# Altium PCB temperature.PcbDoc (part 3 of 3)
Units mil, origin at the board's own origin, x right, y up, seen from the top; angles counter-clockwise.
Board outline 6000 x 4000 mil, 2 copper layers (Top Layer, Bottom Layer); 10 components, 17 nets, 62 pads, 0 vias.
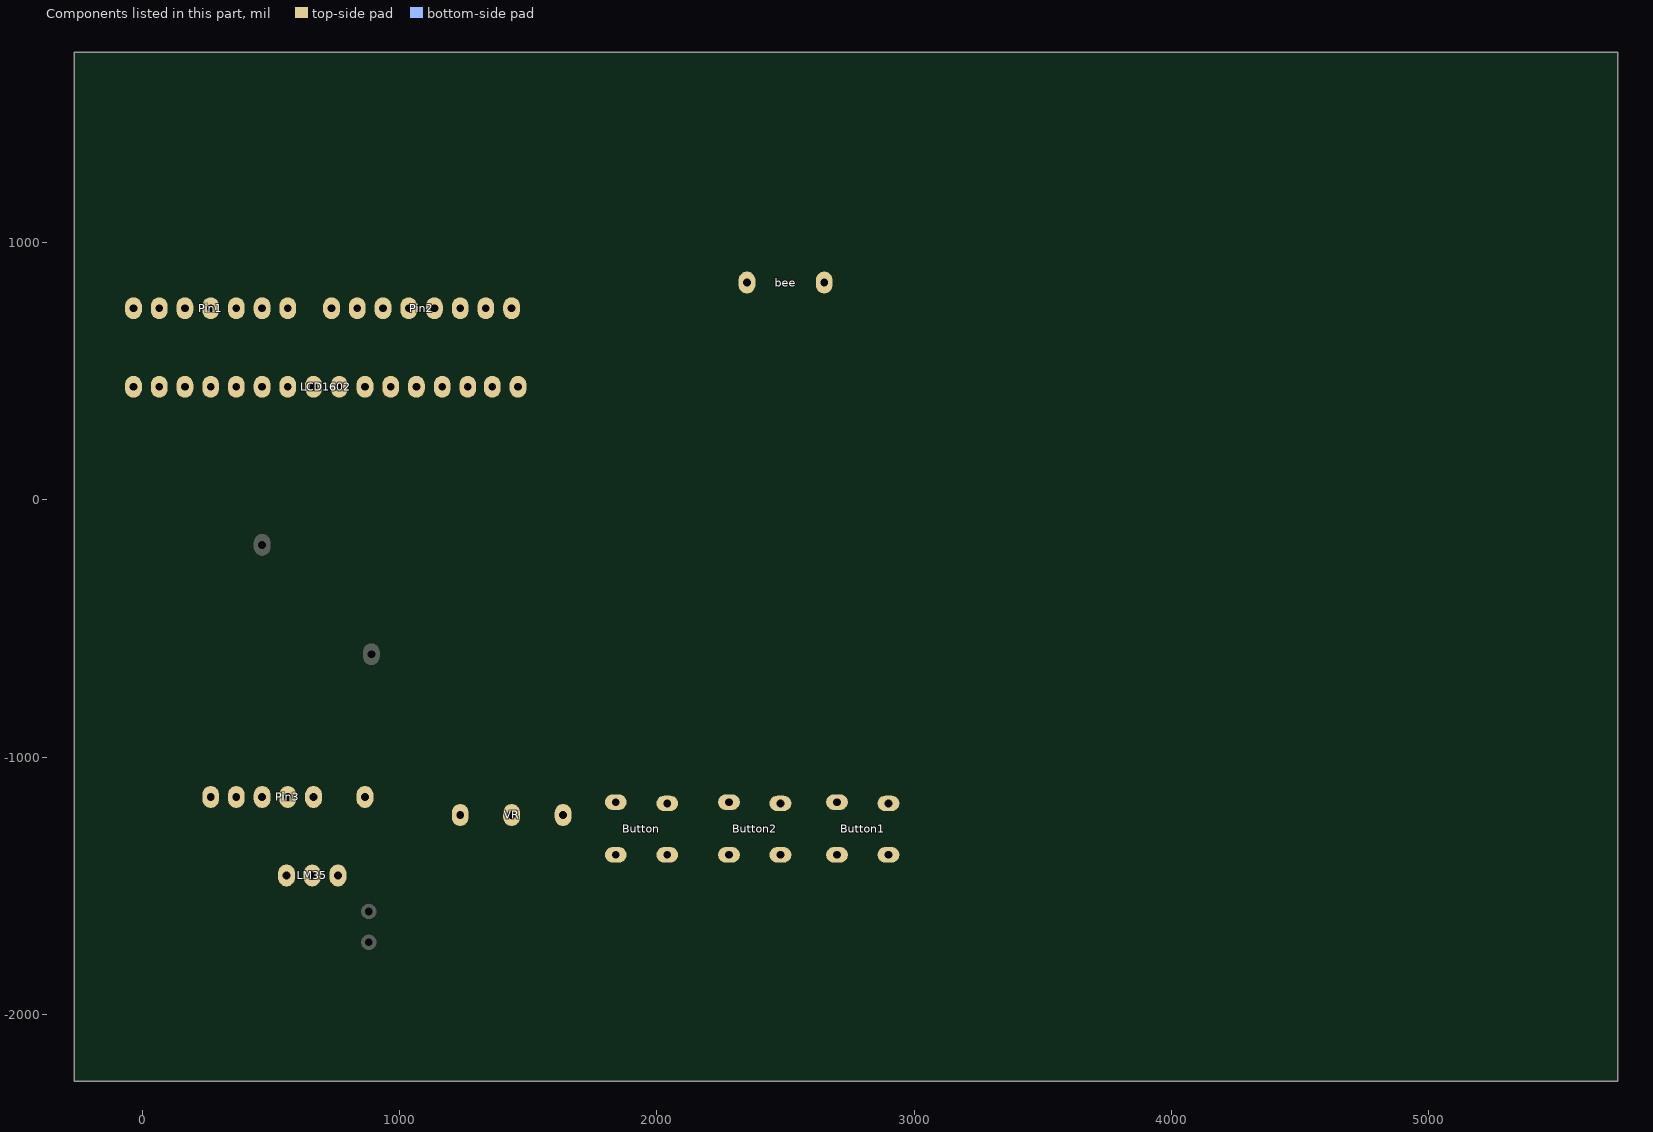
[diagram p3: the components of this part, seen from the top]

## Nets (pads, with @x,y where several pads share a name; then routed paths per layer and width w, separated by ;. In a path a pad name is that pad's centre, name@x,y a point inside that pad or via, vN(x,y) a via of type N, cw(c..) or ccw(c..) an arc to the next point about the centre after c; other vN are vias at no path point) (continued)
copper on no net: (continued)
  Bottom Layer w1: 2606,193 2607,193 ; 2606,195 2609,195 ; 2606,203 2607,203 ; 2606,205 2608,205 ; 2607,-398 2710,-398 ; 2607,-245 2626,-245 ; 2607,69 2738,69 ; 2607,189 2608,189 ; 2607,192 2611,192 ; 2608,-399 2709,-399 ; 2608,68 2738,68 ; 2608,199 2609,199 ; 2608,200 2609,200 ; 2608,202 2609,202 ; 2608,204 2611,204 ; 2609,-400 2707,-400 ; 2609,-244 2626,-244 ; 2609,67 2738,67 ; 2609,187 2653,187 ; 2609,188 2653,188 ; 2609,190 2610,190 ; 2609,194 2610,194 ; 2609,201 2610,201 ; 2609,203 2611,203 ; 2610,-401 2706,-401 ; 2610,-243 2626,-243 ; 2610,-242 2625,-242 ; 2610,-241 2626,-241 ; 2610,-240 2625,-240 ; 2610,-239 2626,-239 ; 2610,-238 2624,-238 ; 2610,-237 2625,-237 ; 2610,-236 2624,-236 ; 2610,-232 2622,-232 ; 2610,-231 2623,-231 ; 2610,-230 2622,-230 ; 2610,-166 2611,-166 ; 2610,-164 2611,-164 ; 2610,-162 2613,-162 ; 2610,66 2739,66 ; 2610,191 2651,191 ; 2610,195 2611,195 ; 2610,197 2612,197 ; 2610,198 2611,198 ; 2610,200 2611,200 ; 2610,205 2643,205 ; 2610,206 2642,206 ; 2611,-235 2625,-235 ; 2611,-234 2625,-234 ; 2611,-233 2624,-233 ; 2611,-229 2623,-229 ; 2611,-228 2623,-228 ; 2611,-227 2622,-227 ; 2611,-226 2623,-226 ; 2611,-225 2622,-225 ; 2611,-224 2620,-224 ; 2611,-223 2622,-223 ; 2611,-221 2618,-221 ; 2611,-170 2612,-170 ; 2611,-167 2613,-167 ; 2611,-165 2613,-165 ; 2611,65 2739,65 ; 2611,189 2652,189 ; 2611,190 2651,190 ; 2611,193 2649,193 ; 2611,194 2613,194 ; 2611,199 2646,199 ; 2611,201 2612,201 ; 2611,202 2612,202 ; 2612,-402 2705,-402 ; 2612,-222 2620,-222 ; 2612,-220 2620,-220 ; 2612,-219 2618,-219 ; 2612,-218 2619,-218 ; 2612,-216 2613,-216 ; 2612,-214 2613,-214 ; 2612,-209 2615,-209 ; 2612,-193 2613,-193 ; 2612,-185 2613,-185 ; 2612,-174 2613,-174 ; 2612,-172 2613,-172 ; 2612,-171 2613,-171 ; 2612,-169 2613,-169 ; 2612,-168 2613,-168 ; 2612,-164 2613,-164 ; 2612,-163 2613,-163 ; 2612,63 2740,63 ; 2612,64 2740,64 ; 2612,192 2650,192 ; 2612,195 2648,195 ; 2612,196 2613,196 ; 2612,200 2645,200 ; 2612,203 2644,203 ; 2612,204 2644,204 ; 2613,-217 2616,-217 ; 2613,-215 2614,-215 ; 2613,-212 2615,-212 ; 2613,-210 2614,-210 ; 2613,-207 2615,-207 ; 2613,-206 2614,-206 ; 2613,-205 2614,-205 ; 2613,-202 2614,-202 ; 2613,-201 2614,-201 ; 2613,-195 2614,-195 ; 2613,62 2741,62 ; 2613,197 2647,197 ; 2613,198 2646,198 ; 2613,201 2645,201 ; 2613,202 2644,202 ; 2614,-403 2703,-403 ; 2614,-216 2618,-216 ; 2614,-214 2616,-214 ; 2614,-213 2615,-213 ; 2614,-199 2615,-199 ; 2614,-197 2615,-197 ; 2614,61 2741,61 ; 2614,194 2617,194 ; 2614,196 2647,196 ; 2615,-215 2616,-215 ; 2615,-211 2616,-211 ; 2615,-210 2616,-210 ; 2615,59 2742,59 ; 2615,60 2742,60 ; 2616,-404 2702,-404 ; 2616,-213 2617,-213 ; 2616,58 2743,58 ; 2617,-405 2700,-405 ; 2617,-217 2618,-217 ; 2617,-215 2618,-215 ; 2617,-214 2618,-214 ; 2617,57 2743,57 ; 2618,-406 2698,-406 ; 2618,55 2744,55 ; 2618,56 2744,56 ; 2618,194 2649,194 ; 2619,-221 2621,-221 ; 2619,-216 2620,-216 ; 2619,54 2744,54 ; 2620,-407 2696,-407 ; 2620,53 2745,53 ; 2621,51 2746,51 ; 2621,52 2745,52 ; 2622,-408 2694,-408 ; 2622,50 2746,50 ; 2623,-232 2624,-232 ; 2623,-230 2625,-230 ; 2623,-227 2624,-227 ; 2623,48 2747,48 ; 2623,49 2747,49 ; 2624,-409 2692,-409 ; 2624,-310 2625,-310 ; 2624,-273 2625,-273 ; 2624,-267 2626,-267 ; 2624,-231 2625,-231 ; 2624,47 2747,47 ; 2625,-279 2626,-279 ; 2625,-263 2627,-263 ; 2625,-258 2627,-258 ; 2625,-238 2626,-238 ; 2625,45 2748,45 ; 2625,46 2748,46 ; 2626,-336 2628,-336 ; 2626,-268 2627,-268 ; 2626,-259 2627,-259 ; 2626,-254 2627,-254 ; 2626,-249 2627,-249 ; 2626,-248 2627,-248 ; 2626,43 2749,43 ; 2626,44 2749,44 ; 2627,-410 2689,-410 ; 2627,41 2750,41 ; 2627,42 2750,42 ; 2628,39 2751,39 ; 2628,40 2750,40 ; 2629,-342 2630,-342 ; 2629,37 2752,37 ; 2629,38 2751,38 ; 2630,-411 2687,-411 ; 2630,35 2752,35 ; 2630,36 2752,36 ; 2631,-347 2632,-347 ; 2631,34 2753,34 ; 2632,-351 2634,-351 ; 2632,-348 2633,-348 ; 2632,32 2754,32 ; 2632,33 2753,33 ; 2633,-412 2683,-412 ; 2633,29 2755,29 ; 2633,30 2754,30 ; 2633,31 2754,31 ; 2634,27 2756,27 ; 2634,28 2756,28 ; 2635,25 2756,25 ; 2635,26 2756,26 ; 2636,23 2757,23 ; 2636,24 2757,24 ; 2637,-413 2679,-413 ; 2637,-359 2640,-359 ; 2637,21 2758,21 ; 2637,22 2757,22 ; 2638,18 2759,18 ; 2638,19 2759,19 ; 2638,20 2758,20 ; 2639,15 2760,15 ; 2639,16 2760,16 ; 2639,17 2759,17 ; 2640,13 2761,13 ; 2640,14 2761,14 ; 2641,-414 2675,-414 ; 2641,10 2762,10 ; 2641,11 2762,11 ; 2641,12 2761,12 ; 2642,-362 2643,-362 ; 2642,7 2763,7 ; 2642,8 2763,8 ; 2642,9 2762,9 ; 2643,-365 2645,-365 ; 2643,3 2764,3 ; 2643,4 2764,4 ; 2643,5 2764,5 ; 2643,6 2764,6 ; 2644,-1 2766,-1 ; 2644,0 2765,0 ; 2644,1 2765,1 ; 2644,2 2764,2 ; 2645,-367 2647,-367 ; 2645,-5 2767,-5 ; 2645,-4 2767,-4 ; 2645,-3 2767,-3 ; 2645,-2 2766,-2 ; 2646,-10 2769,-10 ; 2646,-9 2769,-9 ; 2646,-8 2769,-8 ; 2646,-7 2768,-7 ; 2646,-6 2767,-6 ; 2647,-415 2668,-415 ; 2647,-205 2743,-205 ; 2647,-203 2747,-203 ; 2647,-202 2746,-202 ; 2647,-200 2746,-200 ; 2647,-198 2750,-198 ; 2647,-195 2750,-195 ; 2647,-194 2749,-194 ; 2647,-13 2770,-13 ; 2647,-12 2770,-12 ; 2647,-11 2769,-11 ; 2648,-367 2649,-367 ; 2648,-210 2649,-210 ; 2648,-208 2742,-208 ; 2648,-207 2743,-207 ; 2648,-206 2743,-206 ; 2648,-204 2744,-204 ; 2648,-201 2746,-201 ; 2648,-199 2748,-199 ; 2648,-197 2748,-197 ; 2648,-196 2751,-196 ; 2648,-193 2749,-193 ; 2648,-192 2750,-192 ; 2648,-191 2751,-191 ; 2648,-190 2751,-190 ; 2648,-188 2752,-188 ; 2648,-146 2776,-146 ; 2648,-145 2776,-145 ; 2648,-144 2776,-144 ; 2648,-143 2776,-143 ; 2648,-142 2777,-142 ; 2648,-18 2771,-18 ; 2648,-17 2771,-17 ; 2648,-16 2771,-16 ; 2648,-15 2771,-15 ; 2648,-14 2770,-14 ; 2649,-209 2650,-209 ; 2649,-189 2751,-189 ; 2649,-187 2650,-187 ; 2649,-184 2755,-184 ; 2649,-183 2756,-183 ; 2649,-182 2756,-182 ; 2649,-181 2756,-181 ; 2649,-180 2756,-180 ; 2649,-179 2757,-179 ; 2649,-178 2757,-178 ; 2649,-177 2758,-177 ; 2649,-176 2759,-176 ; 2649,-175 2760,-175 ; 2649,-147 2775,-147 ; 2649,-141 2777,-141 ; 2649,-140 2777,-140 ; 2649,-139 2777,-139 ; 2649,-138 2753,-138 ; 2649,-22 2772,-22 ; 2649,-21 2772,-21 ; 2649,-20 2772,-20 ; 2649,-19 2772,-19 ; 2650,-212 2739,-212 ; 2650,-211 2738,-211 ; 2650,-210 2739,-210 ; 2650,-174 2760,-174 ; 2650,-137 2752,-137 ; 2650,-136 2752,-136 ; 2650,-27 2774,-27 ; 2650,-26 2773,-26 ; 2650,-25 2773,-25 ; 2650,-24 2773,-24 ; 2650,-23 2773,-23 ; 2651,-370 2652,-370 ; 2651,-218 2652,-218 ; 2651,-215 2734,-215 ; 2651,-214 2736,-214 ; 2651,-213 2737,-213 ; 2651,-209 2742,-209 ; 2651,-187 2753,-187 ; 2651,-186 2753,-186 ; 2651,-185 2754,-185 ; 2651,-173 2761,-173 ; 2651,-172 2761,-172 ; 2651,-171 2762,-171 ; 2651,-170 2763,-170 ; 2651,-169 2763,-169 ; 2651,-168 2764,-168 ; 2651,-135 2750,-135 ; 2651,-134 2778,-134 ; 2651,-133 2778,-133 ; 2651,-132 2779,-132 ; 2651,-131 2779,-131 ; 2651,-35 2776,-35 ; 2651,-34 2775,-34 ; 2651,-33 2775,-33 ; 2651,-32 2775,-32 ; 2651,-31 2775,-31 ; 2651,-30 2775,-30 ; 2651,-29 2774,-29 ; 2651,-28 2774,-28 ; 2652,-221 2653,-221 ; 2652,-217 2731,-217 ; 2652,-216 2735,-216 ; 2652,-167 2765,-167 ; 2652,-166 2765,-166 ; 2652,-148 2775,-148 ; 2652,-130 2779,-130 ; 2652,-129 2779,-129 ; 2652,-128 2779,-128 ; 2652,-127 2780,-127 ; 2652,-126 2780,-126 ; 2652,-42 2777,-42 ; 2652,-41 2777,-41 ; 2652,-40 2777,-40 ; 2652,-39 2777,-39 ; 2652,-38 2777,-38 ; 2652,-37 2776,-37 ; 2652,-36 2776,-36 ; 2653,-222 2654,-222 ; 2653,-220 2728,-220 ; 2653,-219 2730,-219 ; 2653,-218 2732,-218 ; 2653,-149 2775,-149 ; 2653,-125 2780,-125 ; 2653,-124 2780,-124 ; 2653,-123 2781,-123 ; 2653,-122 2781,-122 ; 2653,-121 2781,-121 ; 2653,-120 2781,-120 ; 2653,-119 2781,-119 ; 2653,-55 2780,-55 ; 2653,-54 2780,-54 ; 2653,-53 2779,-53 ; 2653,-52 2779,-52 ; 2653,-51 2779,-51 ; 2653,-50 2779,-50 ; 2653,-49 2779,-49 ; 2653,-48 2778,-48 ; 2653,-47 2778,-47 ; 2653,-46 2778,-46 ; 2653,-45 2778,-45 ; 2653,-44 2778,-44 ; 2653,-43 2777,-43 ; 2654,-221 2728,-221 ; 2654,-118 2781,-118 ; 2654,-117 2781,-117 ; 2654,-116 2781,-116 ; 2654,-115 2781,-115 ; 2654,-114 2781,-114 ; 2654,-113 2781,-113 ; 2654,-112 2781,-112 ; 2654,-111 2781,-111 ; 2654,-110 2782,-110 ; 2654,-109 2782,-109 ; 2654,-108 2782,-108 ; 2654,-107 2782,-107 ; 2654,-106 2782,-106 ; 2654,-81 2782,-81 ; 2654,-80 2782,-80 ; 2654,-79 2782,-79 ; 2654,-78 2782,-78 ; 2654,-77 2782,-77 ; 2654,-76 2782,-76 ; 2654,-75 2782,-75 ; 2654,-74 2782,-74 ; 2654,-73 2782,-73 ; 2654,-72 2782,-72 ; 2654,-71 2782,-71 ; 2654,-70 2782,-70 ; 2654,-69 2782,-69 ; 2654,-68 2782,-68 ; 2654,-67 2782,-67 ; 2654,-66 2781,-66 ; 2654,-65 2781,-65 ; 2654,-64 2781,-64 ; 2654,-63 2781,-63 ; 2654,-62 2781,-62 ; 2654,-61 2781,-61 ; 2654,-60 2780,-60 ; 2654,-59 2780,-59 ; 2654,-58 2780,-58 ; 2654,-57 2780,-57 ; 2654,-56 2780,-56 ; 2655,-373 2664,-373 ; 2655,-223 2722,-223 ; 2655,-222 2725,-222 ; 2655,-165 2766,-165 ; 2655,-164 2766,-164 ; 2655,-163 2767,-163 ; 2655,-162 2767,-162 ; 2655,-161 2768,-161 ; 2655,-160 2768,-160 ; 2655,-159 2769,-159 ; 2655,-158 2769,-158 ; 2655,-150 2775,-150 ; 2655,-105 2782,-105 ; 2655,-104 2782,-104 ; 2655,-103 2782,-103 ; 2655,-102 2782,-102 ; 2655,-101 2782,-101 ; 2655,-100 2782,-100 ; 2655,-99 2782,-99 ; 2655,-98 2782,-98 ; 2655,-97 2782,-97 ; 2655,-96 2783,-96 ; 2655,-95 2783,-95 ; 2655,-94 2783,-94 ; 2655,-93 2783,-93 ; 2655,-92 2783,-92 ; 2655,-91 2783,-91 ; 2655,-90 2783,-90 ; 2655,-89 2783,-89 ; 2655,-88 2783,-88 ; 2655,-87 2783,-87 ; 2655,-86 2783,-86 ; 2655,-85 2783,-85 ; 2655,-84 2782,-84 ; 2655,-83 2782,-83 ; 2655,-82 2782,-82 ; 2656,-226 2661,-226 ; 2656,-157 2769,-157 ; 2656,-156 2769,-156 ; 2656,-155 2769,-155 ; 2656,-154 2773,-154 ; 2656,-153 2773,-153 ; 2656,-152 2773,-152 ; 2656,-151 2774,-151 ; 2657,-227 2658,-227 ; 2657,-225 2720,-225 ; 2657,-224 2726,-224 ; 2659,-229 2660,-229 ; 2660,-227 2720,-227 ; 2661,-230 2662,-230 ; 2661,-228 2716,-228 ; 2662,-229 2666,-229 ; 2662,-226 2723,-226 ; 2663,-230 2664,-230 ; 2664,-375 2677,-375 ; 2666,-373 2667,-373 ; 2666,-230 2669,-230 ; 2668,-373 2669,-373 ; 2669,-229 2672,-229 ; 2670,-230 2713,-230 ; 2672,-231 2673,-231 ; 2673,-374 2734,-374 ; 2673,-229 2714,-229 ; 2674,-232 2676,-232 ; 2676,-235 2677,-235 ; 2676,-231 2711,-231 ; 2677,-232 2678,-232 ; 2678,-375 2734,-375 ; 2679,-234 2680,-234 ; 2679,-232 2707,-232 ; 2680,-233 2683,-233 ; 2681,-235 2682,-235 ; 2682,-237 2683,-237 ; 2683,-373 2685,-373 ; 2684,-237 2685,-237 ; 2684,-236 2685,-236 ; 2684,-234 2695,-234 ; 2684,-233 2700,-233 ; 2685,-235 2688,-235 ; 2686,-373 2736,-373 ; 2686,-237 2688,-237 ; 2687,-372 2690,-372 ; 2689,-371 2694,-371 ; 2689,-237 2690,-237 ; 2689,-235 2690,-235 ; 2691,-372 2737,-372 ; 2691,-370 2692,-370 ; 2691,-237 2692,-237 ; 2691,-235 2696,-235 ; 2692,-238 2693,-238 ; 2693,-370 2696,-370 ; 2694,-237 2695,-237 ; 2695,-371 2738,-371 ; 2696,-369 2741,-369 ; 2696,-368 2697,-368 ; 2697,-370 2739,-370 ; 2697,-235 2699,-235 ; 2697,-234 2698,-234 ; 2699,-368 2742,-368 ; 2699,-367 2701,-367 ; 2699,-236 2700,-236 ; 2700,-235 2702,-235 ; 2700,-234 2702,-234 ; 2702,-367 2743,-367 ; 2702,-366 2745,-366 ; 2702,-233 2703,-233 ; 2703,-234 2706,-234 ; 2704,-235 2705,-235 ; 2705,-233 2708,-233 ; 2706,-365 2746,-365 ; 2706,-364 2747,-364 ; 2708,-363 2709,-363 ; 2708,-234 2711,-234 ; 2709,-232 2713,-232 ; 2710,-363 2713,-363 ; 2710,-362 2715,-362 ; 2712,-233 2713,-233 ; 2714,-361 2718,-361 ; 2714,-230 2718,-230 ; 2715,-363 2748,-363 ; 2715,-229 2716,-229 ; 2716,-362 2749,-362 ; 2716,-360 2752,-360 ; 2718,-359 2719,-359 ; 2718,-228 2719,-228 ; 2719,-361 2750,-361 ; 2719,-229 2720,-229 ; 2720,-358 2721,-358 ; 2722,-359 2753,-359 ; 2722,-227 2723,-227 ; 2723,-358 2724,-358 ; 2723,-225 2724,-225 ; 2723,-223 2725,-223 ; 2724,-226 2725,-226 ; 2725,-358 2754,-358 ; 2725,-357 2727,-357 ; 2725,-356 2757,-356 ; 2726,-223 2728,-223 ; 2727,-355 2759,-355 ; 2727,-222 2728,-222 ; 2728,-357 2756,-357 ; 2729,-353 2730,-353 ; 2730,-354 2760,-354 ; 2730,-350 2731,-350 ; 2731,-353 2761,-353 ; 2731,-352 2732,-352 ; 2732,-219 2733,-219 ; 2732,-217 2733,-217 ; 2733,-352 2763,-352 ; 2733,-351 2764,-351 ; 2734,-350 2737,-350 ; 2735,-215 2736,-215 ; 2736,-349 2737,-349 ; 2737,-348 2740,-348 ; 2738,-350 2739,-350 ; 2738,-349 2742,-349 ; 2739,-211 2740,-211 ; 2740,-350 2765,-350 ; 2741,-348 2743,-348 ; 2741,-347 2742,-347 ; 2743,-349 2766,-349 ; 2743,-347 2769,-347 ; 2743,-346 2744,-346 ; 2744,-348 2768,-348 ; 2745,-346 2771,-346 ; 2745,-344 2746,-344 ; 2747,-200 2749,-200 ; 2748,-201 2749,-201 ; 2749,-344 2752,-344 ; 2749,-199 2750,-199 ; 2750,-345 2773,-345 ; 2750,-193 2751,-193 ; 2752,-343 2777,-343 ; 2752,-135 2778,-135 ; 2753,-344 2774,-344 ; 2753,-136 2778,-136 ; 2754,-137 2778,-137 ; 2755,-138 2778,-138 ; 2756,-342 2759,-342 ; 2757,-341 2780,-341 ; 2758,-340 2760,-340 ; 2760,-342 2779,-342 ; 2761,-340 2782,-340 ; 2761,-339 2783,-339 ; 2765,-338 2785,-338 ; 2766,-337 2768,-337 ; 2768,-336 2770,-336 ; 2769,-337 2787,-337 ; 2770,-335 2772,-335 ; 2771,-336 2789,-336 ; 2773,-335 2791,-335 ; 2773,-334 2774,-334 ; 2775,-334 2777,-334 ; 2777,-333 2794,-333 ; 2778,-334 2793,-334 ; 2778,-332 2796,-332 ; 2780,-331 2797,-331 ; 2782,-330 2800,-330 ; 2783,-329 2801,-329 ; 2783,-328 2803,-328 ; 2787,-327 2805,-327 ; 2787,-326 2808,-326 ; 2789,-198 2790,-198 ; 2789,-197 2790,-197 ; 2789,-196 2790,-196 ; 2789,-195 2790,-195 ; 2789,-194 2790,-194 ; 2789,-193 2790,-193 ; 2789,-192 2790,-192 ; 2789,-191 2790,-191 ; 2789,-190 2790,-190 ; 2789,-188 2790,-188 ; 2790,-325 2811,-325 ; 2790,-206 2792,-206 ; 2790,-205 2792,-205 ; 2790,-204 2792,-204 ; 2790,-203 2791,-203 ; 2790,-202 2791,-202 ; 2790,-201 2791,-201 ; 2790,-200 2791,-200 ; 2792,-210 2793,-210 ; 2792,-209 2793,-209 ; 2792,-208 2793,-208 ; 2792,-207 2793,-207 ; 2793,-324 2794,-324 ; 2793,-212 2794,-212 ; 2795,-324 2796,-324 ; 2795,-323 2799,-323 ; 2796,-216 2797,-216 ; 2797,-324 2813,-324 ; 2797,-217 2799,-217 ; 2798,-322 2817,-322 ; 2798,-219 2800,-219 ; 2798,-218 2799,-218 ; 2800,-323 2815,-323 ; 2801,-321 2804,-321 ; 2804,-320 2821,-320 ; 2805,-321 2819,-321 ; 2805,-227 2806,-227 ; 2806,-230 2808,-230 ; 2807,-319 2822,-319 ; 2807,-232 2809,-232 ; 2810,-318 2823,-318 ; 2810,-235 2813,-235 ; 2810,-234 2811,-234 ; 2811,-236 2813,-236 ; 2812,-317 2826,-317 ; 2813,-239 2814,-239 ; 2813,-237 2815,-237 ; 2814,-238 2816,-238 ; 2815,-316 2828,-316 ; 2815,-241 2818,-241 ; 2815,-240 2818,-240 ; 2815,-239 2816,-239 ; 2816,-242 2819,-242 ; 2817,-315 2818,-315 ; 2817,-314 2818,-314 ; 2819,-315 2830,-315 ; 2819,-314 2832,-314 ; 2820,-313 2822,-313 ; 2820,-244 2821,-244 ; 2821,-245 2824,-245 ; 2822,-312 2835,-312 ; 2823,-313 2833,-313 ; 2823,-311 2824,-311 ; 2823,-247 2824,-247 ; 2823,-246 2824,-246 ; 2825,-311 2836,-311 ; 2825,-310 2826,-310 ; 2825,-249 2827,-249 ; 2825,-248 2826,-248 ; 2826,-250 2829,-250 ; 2827,-310 2838,-310 ; 2828,-309 2839,-309 ; 2829,-308 2841,-308 ; 2829,-307 2830,-307 ; 2831,-307 2842,-307 ; 2831,-306 2833,-306 ; 2833,-254 2834,-254 ; 2834,-306 2844,-306 ; 2834,-305 2836,-305 ; 2834,-304 2835,-304 ; 2835,-303 2836,-303 ; 2835,-255 2836,-255 ; 2836,-304 2846,-304 ; 2837,-305 2844,-305 ; 2837,-302 2838,-302 ; 2838,-301 2839,-301 ; 2839,-303 2840,-303 ; 2839,-302 2840,-302 ; 2840,-301 2841,-301 ; 2840,-300 2842,-300 ; 2841,-303 2846,-303 ; 2841,-302 2843,-302 ; 2842,-301 2848,-301 ; 2843,-300 2844,-300 ; 2843,-299 2844,-299 ; 2843,-298 2844,-298 ; 2844,-302 2847,-302 ; 2845,-300 2849,-300 ; 2845,-299 2846,-299 ; 2846,-297 2847,-297 ; 2847,-299 2850,-299 ; 2847,-298 2848,-298 ; 2848,-297 2851,-297 ; 2848,-295 2853,-295 ; 2849,-298 2851,-298 ; 2849,-296 2852,-296 ; 2851,-294 2854,-294 ; 2852,-293 2854,-293 ; 2854,-291 2855,-291 ; 2856,-270 2857,-270 ; 2858,-280 2859,-280
  Bottom Layer w10: -140,-1900 -120,-1960 ; -140,940 -120,1000 ; -130,-1960 -110,-1960 ; -130,1000 -110,1000 ; -120,-760.91 -120,-1960 ; -120,-199.09 -120,1000 ; -100.06,990 -99.94,1010 ; -100,-1900 -120,-1960 ; -100,940 -120,1000 ; -40.13,979.63 -100,1000 ; -39.88,1019.63 -100,1000 ; 1114.13,992.46 -100,1000 ; 1905.87,987.54 3120,980 ; 3059.88,960.37 3120,980 ; 3060.13,1000.37 3120,980 ; 3119.94,970 3120.06,990

## Polygon pours and split planes (outlines as drawn)
NetButton1_2 on Bottom Layer "Bottom Layer-No Net" (solid, remove dead copper, pour order 5): -180,1100 3220,1100 3220,-2020 -180,-2020 -180,1100

## Other copper
Bottom Layer:
  text "3220.062 (mil)" at 1123.91,956.41 h60 r359.64
  text "2960 (mil)" at -84.01,-750.91 h60 r90